# Altium PCB PCB_AT89.PcbDoc
Units mm, origin at the board's own origin, x right, y up, seen from the top; angles counter-clockwise.
Board outline 64 x 64 mm, 2 copper layers (Top Layer, Bottom Layer); 49 components, 58 nets, 189 pads, 5 vias.
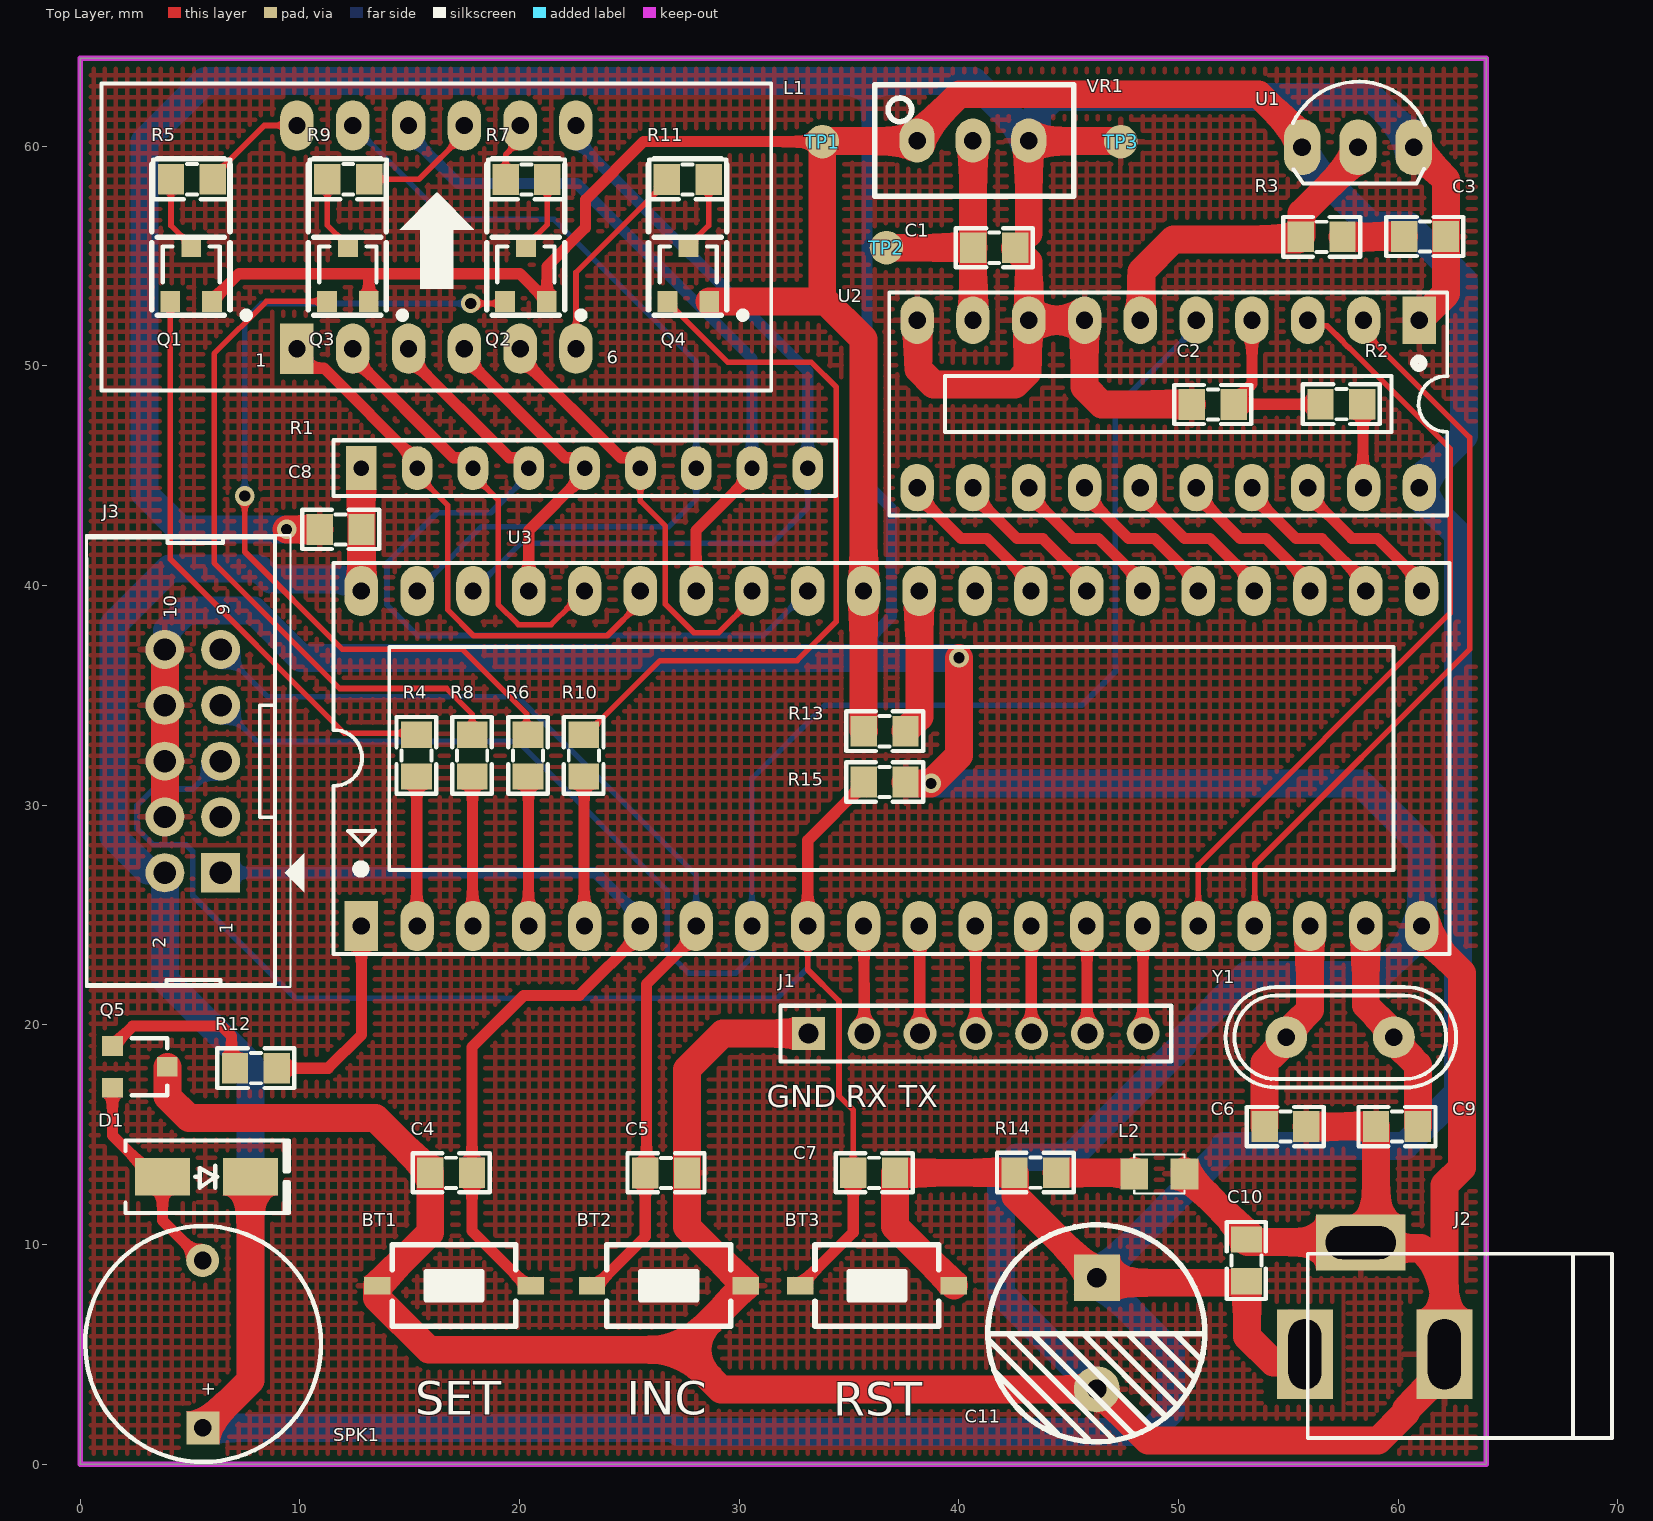
[diagram p0: Top Layer view]
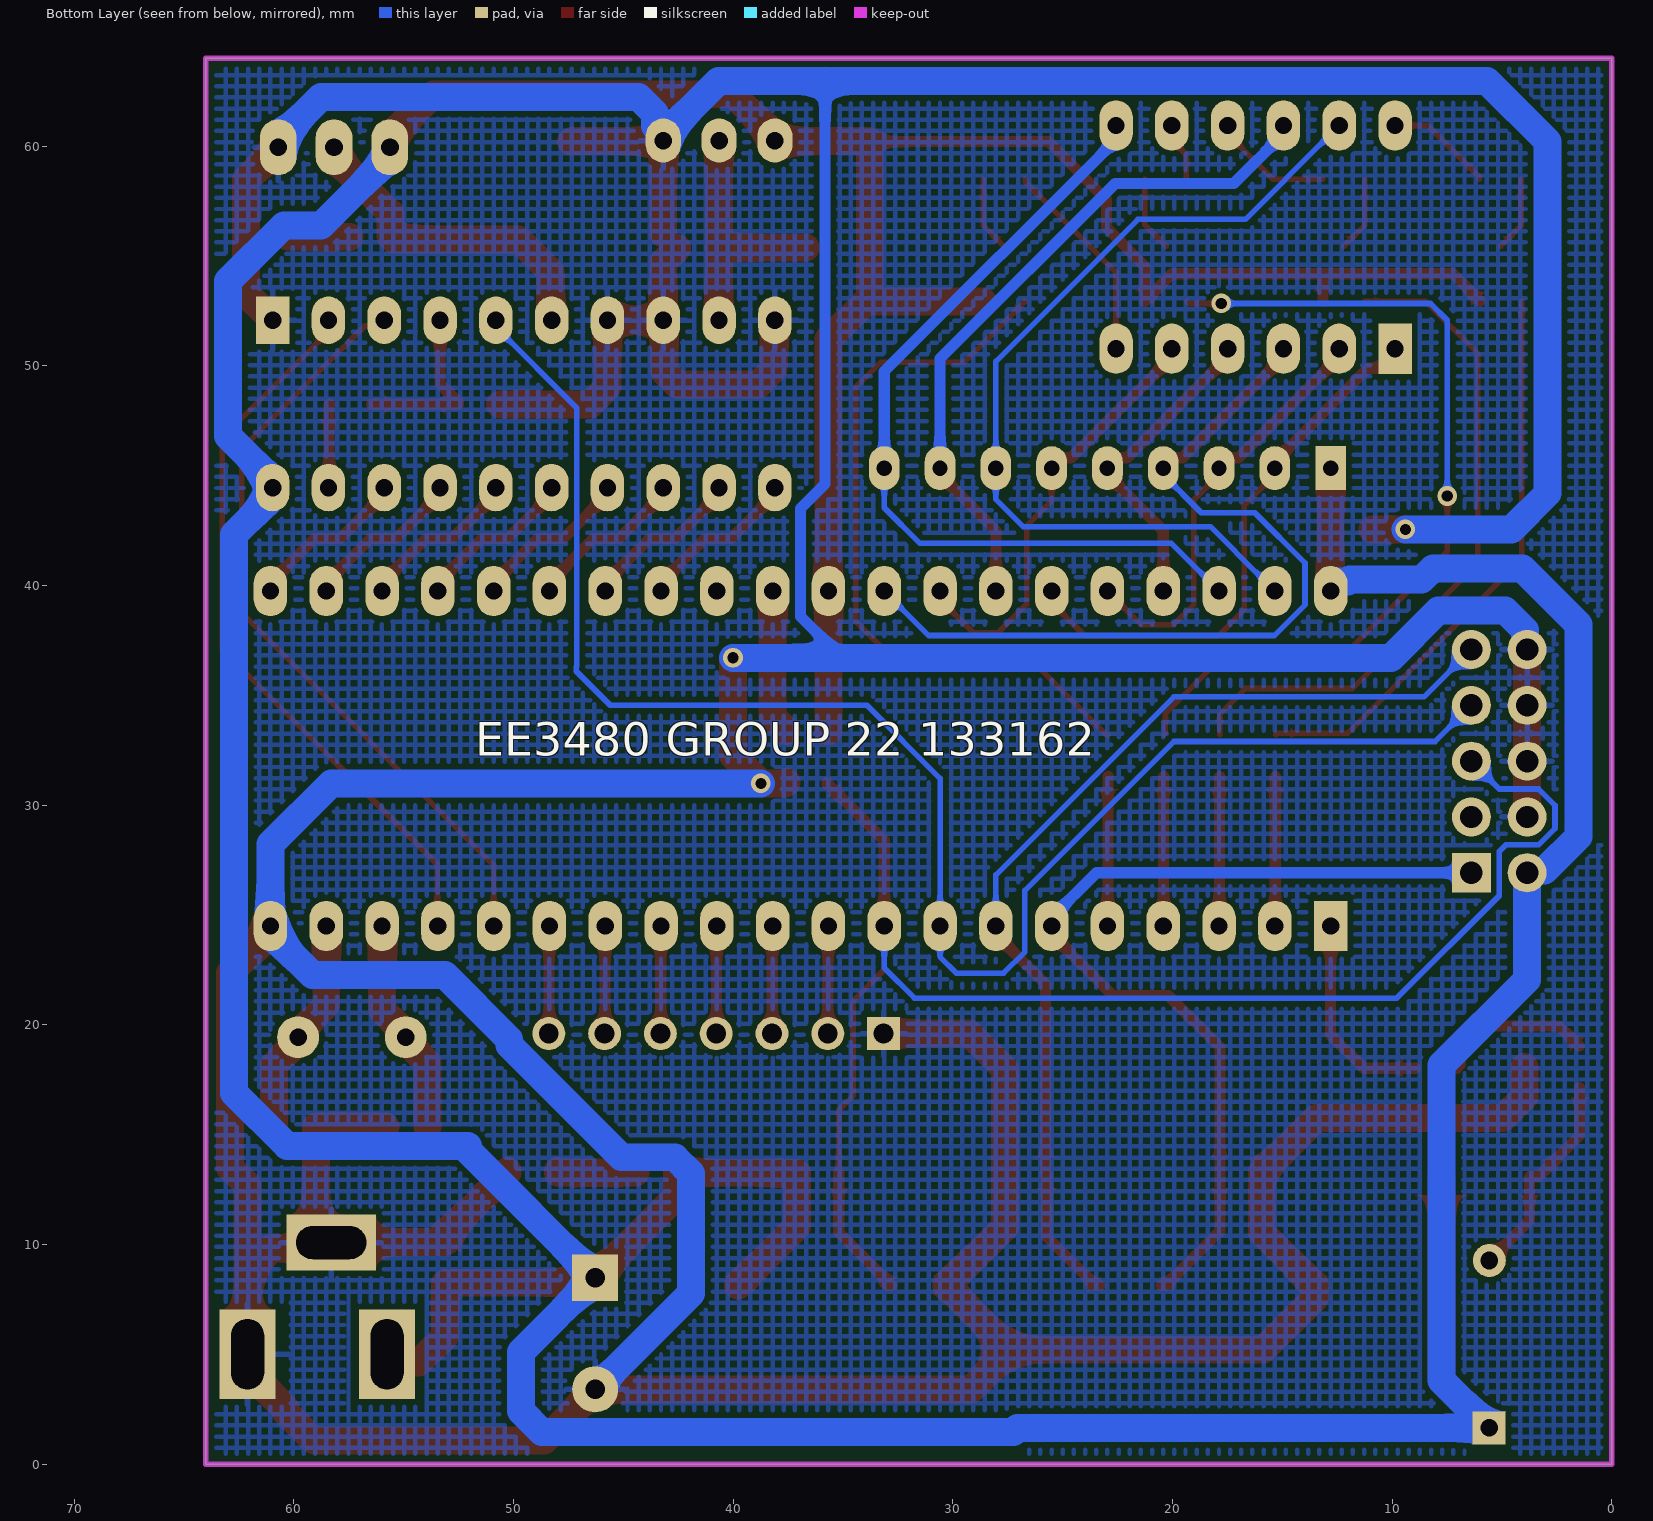
[diagram p1: Bottom Layer view, seen from below]

## Layer stack, top to bottom
Top Solder: solder mask 0.0102, Solder Resist, Dk 3.5
Top Layer: signal copper 0.0356
Dielectric 1: dielectric 0.32, FR-4, Dk 4.8
Bottom Layer: signal copper 0.0356
Bottom Solder: solder mask 0.0102, Solder Resist, Dk 3.5

## Board outline
0,0 0,64 64,64 64,0

## Design rules (kind name [scope] priority, off if disabled: settings)
Clearance [All] p1: gap=0.254 ignorepadtopadclearanceinfootprint=FALSE
ComponentClearance [All] p1: gap=0.254 collisioncheckmode=3 verticalgap=0.008 showdistances=FALSE
HoleSize [All] p1: absolutevalues=TRUE maxlimit=3.302 minlimit=0.025 maxpercent=80.000 minpercent=20.000
PolygonConnect [All] p1: connectstyle=Relief reliefconductorwidth=0.254 reliefentries=4 polygonreliefangle="90 Angle" airgapwidth=0.254
RoutingVias [All] p1: holewidth=0.508 width=0.889 viastyle="Through Hole" minholewidth=0.381 minwidth=0.635 maxholewidth=0.711 maxwidth=1.27
SilkToSolderMaskClearance [IsPad] p1: minsilkscreentomaskgap=0.001 clearancetoexposedcopper=TRUE
SolderMaskExpansion Tenting [IsVia] p1: expansion=0.102 istentingtop=TRUE
SolderMaskExpansion [All] p2: expansion=0.102 istentingtop=FALSE
Width [All] p1: maxlimit=1.27 minlimit=0.254 preferedwidth=0.508
27 further rules are at their usual default settings.

## Components (designator, comment, footprint, x,y, rotation, side; value= is the part's Value field where it differs from the comment)
BT1 "Nut Nhan 2 Chan SMD 3x6x2.5" "Nut Nhan 2 Chan SMD 3x6x2.5" 17.018,8.128 r180 top
BT2 "Nut Nhan 2 Chan SMD 3x6x2.5" "Nut Nhan 2 Chan SMD 3x6x2.5" 26.797,8.128 r0 top
BT3 "Nut Nhan 2 Chan SMD 3x6x2.5" "Nut Nhan 2 Chan SMD 3x6x2.5" 36.271,8.128 r180 top
C1 "104" "tu 0805" 41.605,55.372 r0 top
C2 "104" "tu 0805" 51.562,48.235 r180 top
C3 "104" "tu 0805" 61.214,55.88 r0 top
C4 "104" "tu 0805" 16.891,13.259 r180 top
C5 "104" "tu 0805" 26.67,13.259 r0 top
C6 "22pF" "tu 0805" 54.864,15.367 r0 top
C7 "104" "tu 0805" 36.144,13.259 r180 top
C8 "104" "tu 0805" 11.862,42.545 r180 top
C9 "22pF" "tu 0805" 59.944,15.367 r180 top
C10 "104" "tu 0805" 53.086,9.271 r90 top
C11 "1000uF" "tu hoa 10mm" 46.279,5.944 r270 top
D1 "SS14" "DIODE SMA" 5.747,13.081 r0 top
J1 "Header 7" HDR1X7 33.15,19.6 r0 top
J2 "JACK DC 5.5" "JACK DC 5.5" 58.928,7.544 r180 top value="Jac DC"
J3 "IDC 5X2" IDC10 5,32 r90 top value="Header 5x2"
L1 "Led 7 Segment 4 digitals" LED7SEG-4-0.36 16.347,56.109 r0 top
L2 "LED 0805" LED-0805-Red 50.267,13.21 r180 top
Q1 "HF" SOT23 5.055,54.178 r0 top value=C9014
Q2 "HF" SOT23 20.295,54.178 r0 top value=C9014
Q3 "HF" SOT23 12.192,54.178 r0 top value=C9014
Q4 "HF" SOT23 27.686,54.178 r0 top value=C9014
Q5 "HF" SOT23 2.718,18.085 r270 top value=C9014
R1 "10k" "tro bang a9" 22.962,45.466 r0 top
R2 "10k" "tro smd 0805" 57.404,48.311 r0 top
R3 "220" "tro smd 0805" 56.515,55.804 r180 top
R4 "220" "tro smd 0805" 15.367,32.258 r270 top
R5 "220" "tro smd 0805" 5.08,58.547 r0 top
R6 "220" "tro smd 0805" 20.447,32.258 r270 top
R7 "220" "tro smd 0805" 20.32,58.42 r180 top
R8 "220" "tro smd 0805" 17.907,32.258 r270 top
R9 "220" "tro smd 0805" 12.2,58.547 r0 top
R10 "220" "tro smd 0805" 22.987,32.258 r270 top
R11 "220" "tro smd 0805" 27.661,58.42 r180 top
R12 "220" "tro smd 0805" 7.994,18.085 r0 top
R13 "10k" "tro smd 0805" 36.627,33.299 r180 top
R14 "220" "tro smd 0805" 43.485,13.208 r180 top
R15 "10k" "tro smd 0805" 36.627,30.988 r180 top
SPK1 "Speaker" "Coi Chip Speacker" 5.588,1.651 r90 top
TP1 "TESTPOINT" Testpoint 33.782,60.198 r0 top
TP2 "TESTPOINT" Testpoint 36.703,55.372 r90 top
TP3 "TESTPOINT" Testpoint 47.371,60.198 r90 top
U1 "LM35" QTO-92 58.166,59.944 r0 top
U2 "ADC0804" DIP20 60.96,52.07 r180 top
U3 "AT89C52" DIP40/W0.6 12.8,24.5 r0 top
VR1 "10K" "Bien Tro Vi Chinh Dung" 40.64,60.249 r0 top
Y1 "12Mhz" "Thach Anh 2 chan cam" 57.353,19.431 r180 top value=4Mhz

## Footprints (in the part's own frame and the unit in brackets; to place one, negate y for a bottom-side part, rotate by r counter-clockwise, add the part's x,y. Pads: shape width x height; smd on the part's side, far side on the other; paste and mask are expansions set on the pad)
"Bien Tro Vi Chinh Dung" [mm] "Bien tro vi chinh"
  oval 1.6x2 hole 0.8: 1(-2.54,0) 2(0,0) 3(2.54,0)
  silkscreen extent -4.47,-2.54 4.6,2.54, body extent -4.54,-2.4 4.66,2.4, height 12.02
"Coi Chip Speacker" [mm]
  rect 1.5x1.5 hole 0.8: 1(0,0)
  round 1.5 hole 0.8: 2(7.62,0.013)
  silkscreen extent -1.55,-5.38 9.18,5.36, body extent -2.22,-6 13.24,6, height 4.5
"DIODE SMA" [mm] "SMA"
  rect 2.5x1.7 smd: 1(-2,0) 2(2,0)
  silkscreen extent -3.68,-1.65 3.75,1.65, body extent -2.6,-1.37 2.6,1.37, height 2.4
DIP20 [mil]
  rect 60x85 hole 31: 1(0,0)
  oval 60x85 hole 31: 2(100,0) 3(200,0) 4(300,0) 5(400,0) 6(500,0) 7(600,0) 8(700,0) 9(800,0) 10(900,0) 11(900,300) 12(800,300) 13(700,300) 14(600,300) 15(500,300) 16(400,300) 17(300,300) 18(200,300) 19(100,300) 20(0,300)
  silkscreen extent -50,-50 950,350, body extent -82,0 962,308, height 180
DIP40/W0.6 [mil] "40 PIN, W 600mil, Pin to pin 100mil"
  rect 60x90 hole 31: 1(0,0)
  oval 60x90 hole 31: 2(100,0) 3(200,0) 4(300,0) 5(400,0) 6(500,0) 7(600,0) 8(700,0) 9(800,0) 10(900,0) 11(1000,0) 12(1100,0) 13(1200,0) 14(1300,0) 15(1400,0) 16(1500,0) 17(1600,0) 18(1700,0) 19(1800,0) 20(1900,0) 21(1900,600) 22(1800,600) 23(1700,600) 24(1600,600) 25(1500,600) 26(1400,600) 27(1300,600) 28(1200,600) 29(1100,600) 30(1000,600) 31(900,600) 32(800,600) 33(700,600) 34(600,600) 35(500,600) 36(400,600) 37(300,600) 38(200,600) 39(100,600) 40(0,600)
  silkscreen extent -50,-50 1950,650, body extent -82,-10 1982,600, height 224
HDR1X7 [mm] "Connector; Header; 7 Position"
  rect 1.5x1.5 hole 0.9: 1(0,0)
  round 1.5 hole 0.9: 2(2.54,0) 3(5.08,0) 4(7.62,0) 5(10.16,0) 6(12.7,0) 7(15.24,0)
  silkscreen extent -1.27,-1.27 16.51,1.27
IDC10 [mil]
  rect 70x70 hole 40: 1(-200,-55)
  round 70 hole 40: 2(-200,45) 3(-100,-55) 4(-100,45) 5(0,-55) 6(0,45) 7(100,-55) 8(100,45) 9(200,-55) 10(200,45)
  silkscreen extent -405,-205 405,186, body extent -400,-178 400,180, height 366
"JACK DC 5.5" [mil] "Jac DC input"
  rect 100x160 hole 59.06 slot 125.98 at 90 deg: 1(125,100) 2(-125,100)
  rect 160x100 hole 59.06 slot 125.98 at 0 deg: 3(25,-100)
  silkscreen extent -425,-80 120,250, body extent -410,-105 134,269, height 434
LED7SEG-4-0.36 [mil]
  rect 60x90 hole 31: 1(-255,-210)
  oval 60x90 hole 31: 2(-155,-210) 3(-55,-210) 4(45,-210) 5(145,-210) 6(245,-210) 7(245,190) 8(145,190) 9(45,190) 10(-55,190) 11(-155,190) 12(-255,190)
  silkscreen extent -605,-285 595,265, body extent -596,-291 586,260, height 276
LED-0805-Red [mil]
  rect 50x55 smd: 1(0,0) 2(90,0)
  silkscreen extent 0,-35 90,35, body extent 5,-25 85,25, height 43
"Nut Nhan 2 Chan SMD 3x6x2.5" [mm] "Switch SMD type"
  rect 1.2x0.8 smd: 1(-3.5,0) 2(3.5,0)
  silkscreen extent -2.82,-1.85 2.82,1.85, body extent -3.05,-1.85 3.05,1.85, height 2.5
QTO-92 [mil] "TO-92"
  oval 66x100 hole 32: 1(-100,0) 2(0,0) 3(100,0)
  silkscreen extent -117,-65 120,118, body extent -109,-66 109,95, height 245
SOT23 [mm] "SOT23"
  rect 0.9x0.95 smd: 1(-0.95,-1.25) 2(0,1.25)
  rect 0.9x0.95 smd mask+0: 3(0.95,-1.25)
  silkscreen extent -1.3,-0.37 1.3,1.25, body extent -1.52,-1.23 1.48,1.27, height 1.06
Testpoint [mil]
  round 60 smd: 1(0,0)
"Thach Anh 2 chan cam" [mm]
  round 1.905 hole 0.8: 1(-2.45,0) 2(2.45,0)
  silkscreen extent -5.28,-2.29 5.21,2.29, body extent -5.68,-2.36 5.68,2.29, height 3.5
"tro bang a9" [mm]
  rect 1.4x2 hole 0.7: 1(-10.16,-0.127)
  oval 1.4x2 hole 0.7: 2(-7.62,-0.127) 3(-5.08,-0.127) 4(-2.54,-0.127) 5(0,-0.127) 6(2.54,-0.127) 7(5.08,-0.127) 8(7.62,-0.127) 9(10.16,-0.127)
  silkscreen extent -11.43,-1.4 11.43,1.14, body extent -11.25,-0.76 11.25,0.49, height 5.57
"tro smd 0805" [mm]
  rect 1.2x1.4 smd: 1(-0.946,-0.061) 2(0.954,-0.061)
  silkscreen extent -1.75,-0.97 1.75,0.84, body extent -1.56,-0.76 1.44,0.64, height 0.53
"tu 0805" [mm] "Compoment SMD 80x50mil"
  rect 1.2x1.4 smd: 1(-0.946,-0.003) 2(0.954,-0.003)
  silkscreen extent -1.75,-0.89 1.75,0.89, body extent -1.01,-0.64 1.01,0.63, height 0.61
"tu hoa 10mm" [mm]
  rect 2.1x2.1 hole 0.9: 1(-2.54,0)
  round 2.1 hole 0.9: 2(2.54,0)
  silkscreen extent -4.95,-4.96 4.93,4.92, body extent -5,-5 4.97,5, height 20.01

## Part data
C1 C2 C3 C4 C5 C6 C7 C8 C9 C10: library part CAP0805, "SMD", Chung_Loai=Dán, Don_Vi=Con, Ma_Hang=MH004551, So_Chan=2, Ten_Linh_Kien="Tụ 0805 104-100nF 10% 50V"
C11: library part CAPElectrolytic, "THT", Chung_Loai=Cắm, Don_Vi=Con, Ma_Hang=MH006614, So_Chan=2, Ten_Linh_Kien="Tụ Hóa 1000uF 10V 10x12MM"
D1: library part "Diode SS14 ( 1N5819)", "Dán", Chung_Loai=Dán, Don_Vi=Con, Ma_Hang=MH002211, Ten_Linh_Kien="Diode SS14 DO214 Schottky 1A 40V ( 1N5819 DO214)"
J1: "Header, 7-Pin", LatestRevisionDate=17-Jul-2002, LatestRevisionNote="Re-released for DXP Platform.", Publisher="Altium Limited"
J2 U1 U2 U3: "THT"
  U2: Chung_Loai=Cắm, Don_Vi=Con, Ma_Hang=MH002626, Ten_Linh_Kien="ADC0804LCN DIP20"
  U3: Chung_Loai=Cắm, Don_Vi=Con, Ma_Hang=MH002200, Ten_Linh_Kien="AT89C52-24PC DIP40"
J3: library part "ICSP 5x2", "THT"
L1: library part LED7SEG-A-0.36-4DIGIT, "4 digit 7 segment anot", Category=LED, Solder=WAVE
L2: library part LED0805, "SMD", Chung_Loai=Dán, Don_Vi=Con, Ma_Hang=MH000897, Ten_Linh_Kien="LED 0805 Màu Đỏ (Red)"
Q1 Q2 Q3 Q4 Q5: library part "C1815 HF SMD", "NPN transistor"
R1: library part "Tro Bang A9 10k", "Cắm", Chung_Loai=Cắm, Don_Vi=Con, Ma_Hang=MH001442, So_Chan=9, Ten_Linh_Kien="Trở Băng A09-103 10k 1/8w 5%"
R2 R3 R4 R5 R6 R7 R8 R9 R10 R11 R12 R13 R14 R15: library part RES0805, "SMD", Chung_Loai=Dán, Don_Vi=Con, Ma_Hang=MH005473, So_Chan=2, Ten_Linh_Kien="Trở 0805 1% 10k"
SPK1: library part "Coi Chip Speaker", "Còi chip"
TP1 TP2 TP3: "SMD"
VR1: library part RESVariable, "THT", Chung_Loai=Cắm, Don_Vi=Con, Ma_Hang=MH003232, Ten_Linh_Kien="Biến Trở VR 103-10K 3296W"
Y1: library part "Thach Anh 2 chan Cam", "Crystal For all Crystal 2pin."
BT1 BT2 BT3: Ma_Hang=MH001036, Ten="Nút Nhấn 2 Chân 3x6x2.5MM SMD"

## Via types
v1: diameter 0.889, hole 0.508, Top Layer to Bottom Layer, tented both sides, 5 vias

## Nets (pads, with @x,y where several pads share a name; then routed paths per layer and width w, separated by ;. In a path a pad name is that pad's centre, name@x,y a point inside that pad or via, vN(x,y) a via of type N, cw(c..) or ccw(c..) an arc to the next point about the centre after c; other vN are vias at no path point)
+5V: BT3.1 C7.1 C8.1 C10.1 C11.1 D1.2 J2.1 J3.2 Q1.3 Q2.3 Q3.3 Q4.3 R1.1 R13.2 R14.2 SPK1.1 TP1.1 U1.1 U2.20 U3.31 U3.40 VR1.1 | length 315.3
  Top Layer w0.508: Q1.3 6.005,52.953 7.239,54.188 13.081,54.188 ; Q3.3 13.142,54.127 13.081,54.188 ; Q2.3 Q2.3@21.245,52.953 ; TP1.1 25.654,60.198 23.007,57.551 23.007,56.281 21.245,54.519 Q2.3@21.245,52.953 ; 13.081,54.188 20.01,54.188 Q2.3@21.245,52.953
  Top Layer w1.27: SPK1.1 7.747,3.81 D1.2 ; U3.40 12.804,39.744 12.804,42.545 C8.1 12.805,42.551 12.805,45.336 R1.1 ; Q4.3 33.624,52.928 33.782,53.086 ; R13.2 35.666,33.366 35.666,39.734 U3.31 35.66,51.208 33.782,53.086 ; BT3.1 37.09,10.809 C7.1 37.093,13.266 42.526,13.266 R14.2 42.565,13.235 42.565,12.197 C11.1 46.504,8.259 53.08,8.259 53.115,8.224 53.115,5.813 54.313,4.615 55.365,4.615 J2.1 55.753,5.766 J2.1@55.118,6.401 ; U1.1 55.626,60.376 53.645,62.357 40.017,62.357 38.1,60.44 VR1.1 38.075,60.223 33.807,60.223 TP1.1 33.782,53.086
  Bottom Layer w1.27: J3.2@3.067,27.017 1.524,28.56 1.524,38.227 4.064,40.767 8.15,40.767 8.658,40.259 11.929,40.259 12.018,40.17 12.683,40.17 12.8,40.052 U3.40 ; J3.2 3.857,22.051 7.747,18.161 7.747,3.81 SPK1.1 27.055,1.651 27.242,1.465 48.709,1.465 49.657,2.413 49.657,5.105 C11.1 52.07,14.275 52.07,14.478 60.298,14.478 62.711,16.891 62.711,42.313 60.96,44.064 U2.20 60.96,44.768 62.984,46.792 62.984,53.856 60.452,56.388 58.75,56.388 55.626,59.512 U1.1
A: L1.11 R1.7 U3.39 | length 40.8
  Bottom Layer w0.254: L1.11 12.41,60.897 12.997,60.311 13.034,60.311 16.686,56.659 21.573,56.659 28.042,50.19 R1.7 28.042,43.917 26.797,42.672 18.272,42.672 15.964,40.364 15.927,40.364 15.34,39.777 U3.39
ALE: R13.1 U3.30 | length 6.6
  Top Layer w1.27: R13.1 37.572,33.39 38.2,34.018 U3.30
B: L1.7 R1.9 U3.38 | length 38.6
  Bottom Layer w0.254: U3.38 17.88,39.777 18.467,40.364 18.504,40.364 20.05,41.91 31.496,41.91 33.122,43.536 R1.9
  Bottom Layer w0.508: L1.7 22.57,60.283 33.122,49.732 R1.9
C: L1.4 R1.5 U3.37 | length 14.6
  Top Layer w0.508: L1.4 17.49,50.394 22.074,45.81 22.55,45.81 22.962,45.398 R1.5 22.962,45.039 20.42,42.497 U3.37
CLKI: C2.1 R2.1 U2.4 | length 8.1
  Top Layer w0.508: U2.4 53.34,49.17 52.508,48.338 C2.1 52.514,48.244 56.452,48.244 R2.1
CLKR: R2.2 U2.19 | length 3.8
  Top Layer w0.508: R2.2 58.389,48.219 58.389,44.481 U2.19
D: L1.2 R1.3 U3.36 | length 19.6
  Top Layer w0.254: R1.3 17.882,45.039 19.024,43.897 19.024,39.139 19.947,38.216 21.436,38.216 22.336,39.116 22.373,39.116 22.96,39.703 U3.36
  Top Layer w0.508: L1.2 12.41,50.394 16.994,45.81 17.47,45.81 17.882,45.398 R1.3
DB0: U2.18 U3.21 | length 7.5
  Top Layer w0.508: U2.18 55.88,44.133 57.886,42.127 59.054,42.127 61.06,40.121 U3.21
DB1: U2.17 U3.22 | length 7.5
  Top Layer w0.508: U2.17 53.34,44.133 55.346,42.127 56.514,42.127 58.52,40.121 U3.22
DB2: U2.16 U3.23 | length 7.5
  Top Layer w0.508: U2.16 50.8,44.133 52.806,42.127 53.974,42.127 55.98,40.121 U3.23
DB3: U2.15 U3.24 | length 7.5
  Top Layer w0.508: U2.15 48.26,44.133 50.266,42.127 51.434,42.127 53.44,40.121 U3.24
DB4: U2.14 U3.25 | length 7.5
  Top Layer w0.508: U2.14 45.72,44.133 47.726,42.127 48.894,42.127 50.9,40.121 U3.25
DB5: U2.13 U3.26 | length 7.5
  Top Layer w0.508: U2.13 43.18,44.133 45.186,42.127 46.354,42.127 48.36,40.121 U3.26
DB6: U2.12 U3.27 | length 7.5
  Top Layer w0.508: U2.12 40.64,44.133 42.646,42.127 43.814,42.127 45.82,40.121 U3.27
DB7: U2.11 U3.28 | length 7.5
  Top Layer w0.508: U2.11 38.1,44.133 40.106,42.127 41.274,42.127 43.28,40.121 U3.28
E: L1.1 R1.2 U3.35 | length 25.6
  Top Layer w0.254: R1.2 15.342,45.039 16.737,43.644 16.737,38.886 17.915,37.708 23.992,37.708 25.5,39.216 U3.35
  Top Layer w0.508: L1.1 9.87,50.394 10.378,49.886 11.095,49.886 15.342,45.639 R1.2
F: L1.10 R1.8 U3.34 | length 31.9
  Top Layer w0.508: U3.34 28.04,42.497 30.582,45.039 R1.8
  Bottom Layer w0.508: L1.10 14.95,60.554 17.211,58.293 22.606,58.293 30.582,50.317 R1.8
G: L1.5 R1.6 U3.33 | length 20.1
  Top Layer w0.254: R1.6 25.502,43.84 26.643,42.699 26.643,39.14 27.937,37.846 29.067,37.846 30.58,39.359 U3.33
  Top Layer w0.508: L1.5 20.03,50.394 24.614,45.81 25.09,45.81 25.502,45.398 R1.6
GND: BT1.2 BT2.2 C1.2 C2.2 C3.2 C4.2 C5.2 C6.2 C8.2 C9.2 C10.2 C11.2 J1.1 J2.2 J2.3 J3.4 J3.6 J3.8 J3.10 L2.1 Q5.2 R15.1 TP3.1 U1.3 U2.1 U2.7 U2.8 U2.10 U3.20 VR1.3 | length 412.7
  Top Layer w1.27: J3.4 J3.8 J3.10 ; Q5.2 3.968,16.733 4.953,15.748 13.451,15.748 15.872,13.327 15.902,13.327 15.937,13.292 C4.2 15.937,10.547 BT1.2 13.518,7.564 15.875,5.207 27.376,5.207 ; v1(9.398,42.545) 10.904,42.545 C8.2 ; J1.1 29.252,19.6 27.624,17.972 C5.2 27.624,10.801 BT2.2 27.376,5.207 ; R15.1 37.572,31.023 37.607,30.988 v1(38.735,30.988) 40.005,32.258 v1(40.005,36.703) ; U2.10 38.149,52.021 38.149,49.844 38.844,49.149 42.563,49.149 43.131,49.717 43.131,52.021 U2.8 ; C1.2 42.56,55.339 43.18,54.718 U2.8 ; 43.18,56.019 VR1.3 43.205,60.223 47.346,60.223 TP3.1 ; L2.1@50.267,13.335 50.267,13.272 53.05,10.488 53.05,10.159 53.085,10.124 53.115,10.124 53.135,10.104 58.273,10.104 J2.3 ; C2.2 46.504,48.238 45.72,49.022 U2.7 U2.8 ; C6.2 55.822,15.367 58.986,15.367 C9.2 58.99,10.719 58.355,10.084 J2.3 ; U1.3 60.706,59.622 60.894,59.434 61.216,59.434 62.168,58.482 C3.2 62.168,53.278 61.404,52.515 61.087,52.515 60.96,52.388 U2.1 ; U3.20 61.06,24.188 62.896,22.352 62.896,13.493 62.103,12.7 62.103,8.763 ; 27.376,5.207 29.179,3.404 C11.2 48.616,1.067 59.08,1.067 60.359,2.346 60.359,2.498 62.103,4.242 J2.2 62.103,8.763 ; J2.3 58.547,9.83 61.036,9.83 62.103,8.763
  Bottom Layer w0.508: 35.052,36.703 36.93,38.581 36.93,43.506 35.814,44.622 35.814,62.967
  Bottom Layer w1.27: J3.10 3.954,37.177 3.954,37.957 4.855,38.858 7.904,38.858 10.059,36.703 35.052,36.703 v1(40.005,36.703) ; v1(9.398,42.545) 4.572,42.545 2.921,44.196 2.921,60.198 5.69,62.967 35.814,62.967 40.662,62.967 VR1.3@43.18,60.449 ; v1(38.735,30.988) 58.293,30.988 61.06,28.221 U3.20 61.06,24.17 59.149,22.259 53.12,22.259 50.188,19.327 50.188,19.081 45.078,13.97 42.654,13.97 41.91,13.226 41.91,7.772 C11.2 ; VR1.3 VR1.3@43.18,60.449 ; U1.3 60.706,60.278 58.754,62.23 44.305,62.23 43.561,61.486 43.561,60.919 43.18,60.538 VR1.3@43.18,60.449
H: L1.3 R1.4 U3.32 | length 38.9
  Top Layer w0.508: L1.3 14.95,50.394 19.534,45.81 20.01,45.81 20.422,45.398 R1.4
  Bottom Layer w0.254: R1.4 20.422,45.039 18.69,43.307 16.256,43.307 13.97,41.021 13.97,39.113 15.364,37.719 31.099,37.719 32.496,39.116 32.533,39.116 33.12,39.703 U3.32
INC: BT2.1 C5.1 J3.9 U3.7 | length 46.7
  Top Layer w0.508: BT2.1 23.497,8.128 25.724,10.355 C5.1 25.781,13.312 25.781,21.86 28.04,24.119 U3.7
  Bottom Layer w0.254: J3.9 8.552,34.925 19.939,34.925 28.04,26.824 U3.7
INT0: J1.4 U3.12 | length 4.9
  Top Layer w0.508: U3.12 40.755,24.485 40.755,19.615 J1.4
INT1: J1.5 U3.13 | length 4.9
  Top Layer w0.508: U3.13 43.295,24.485 43.295,19.615 J1.5
INTR: J3.7 U2.5 U3.8 | length 75.4
  Bottom Layer w0.254: J3.7 8.044,32.893 19.939,32.893 26.717,26.115 26.717,23.321 27.686,22.352 29.845,22.352 30.58,23.087 U3.8 30.58,31.215 33.909,34.544 45.593,34.544 47.139,36.09 47.139,36.3 47.117,36.322 47.117,48.07 50.8,51.753 U2.5
L1: L1.12 R5.2 | length 4.9
  Top Layer w0.254: R5.2 6.034,58.586 8.383,60.935 L1.12
L2: L1.9 R9.2 | length 5.6
  Top Layer w0.254: R9.2 15.423,58.486 17.49,60.554 L1.9
L3: L1.8 R7.2 | length 2.7
  Top Layer w0.254: R7.2 19.366,59.602 20.03,60.266 L1.8
L4: L1.6 R11.2 | length 9.4
  Top Layer w0.254: L1.6 22.57,54.245 26.706,58.381 R11.2
LED: L2.2 R14.1 | length 3.6
  Top Layer w1.27: R14.1 47.979,13.27 47.981,13.272 L2.2@47.981,13.335
NetC3_1: C3.1 R3.1 | length 2.8
  Top Layer w1.27: R3.1 57.467,55.871 60.262,55.871 C3.1
NetD1_1: D1.1 Q5.3 SPK1.2 | length 9.8
  Top Layer w0.508: Q5.3 1.468,14.96 3.347,13.081 D1.1 3.747,11.099 SPK1.2
NetQ1_1: Q1.1 R4.1 | length 26.2
  Top Layer w0.254: Q1.1 4.105,41.189 12.019,33.274 15.236,33.274 R4.1
NetQ1_2: Q1.2 R5.1 | length 3.4
  Top Layer w0.254: R5.1 4.134,56.373 5.055,55.453 Q1.2
NetQ2_1: Q2.1 R6.1 | length 39.6
  Top Layer w0.254: v1(7.493,44.069) 7.493,41.529 11.938,37.084 17.399,37.084 20.32,34.163 20.32,33.27 R6.1 ; v1(17.78,52.832) 19.248,52.832 Q2.1
  Bottom Layer w0.254: v1(7.493,44.069) 7.493,52.07 8.255,52.832 v1(17.78,52.832)
NetQ2_2: Q2.2 R7.1 | length 3.5
  Top Layer w0.254: Q2.2 20.295,55.453 21.266,56.424 R7.1
NetQ3_1: Q3.1 R8.1 | length 31.2
  Top Layer w0.254: Q3.1 8.478,52.928 6.096,50.546 6.096,41.021 11.811,35.306 16.681,35.306 17.846,34.141 R8.1
NetQ3_2: Q3.2 R9.1 | length 3.4
  Top Layer w0.254: R9.1 11.254,56.391 12.192,55.453 Q3.2
NetQ4_1: Q4.1 R10.1 | length 33.6
  Top Layer w0.254: R10.1 23.026,33.204 26.399,36.576 32.639,36.576 34.417,38.354 34.417,49.022 33.274,50.165 29.474,50.165 26.736,52.903 Q4.1
NetQ4_2: Q4.2 R11.1 | length 3.4
  Top Layer w0.254: Q4.2 27.686,55.453 28.606,56.373 R11.1
NetQ5_1: Q5.1 R12.1 | length 7.5
  Top Layer w0.508: Q5.1 1.493,19.035 2.397,19.939 6.433,19.939 6.886,19.486 6.886,18.186 R12.1
Q1: R4.2 U3.2 | length 6.8
  Top Layer w0.508: R4.2 15.323,31.287 15.323,24.517 U3.2
Q2: R8.2 U3.3 | length 6.8
  Top Layer w0.508: R8.2 17.863,31.287 17.863,24.517 U3.3
Q3: R6.2 U3.4 | length 6.8
  Top Layer w0.508: R6.2 20.403,31.287 20.403,24.517 U3.4
Q4: R10.2 U3.5 | length 6.8
  Top Layer w0.508: R10.2 22.943,31.287 22.943,24.517 U3.5
RD: U2.2 U3.17 | length 33.6
  Top Layer w0.254: U3.17 53.467,24.527 53.467,27.305 63.246,37.084 63.246,46.736 58.42,51.562 U2.2
RST: BT3.2 C7.2 J3.5 R15.2 U3.9 | length 69.1
  Top Layer w0.254: U3.9 33.12,22.506 34.544,21.082 34.544,16.764 35.19,16.118 C7.2
  Top Layer w0.508: BT3.2 32.971,8.128 33.117,8.274 33.117,8.474 35.19,10.547 C7.2 ; U3.9 33.12,28.396 35.672,30.949 35.723,30.949 R15.2@35.723,31.049
  Bottom Layer w0.254: J3.5 5.127,30.73 3.331,30.73 2.587,29.986 2.587,28.934 3.331,28.19 4.83,28.19 5.127,27.893 5.127,25.873 9.791,21.209 31.75,21.209 33.12,22.579 U3.9
RX: J1.2 U3.10 | length 4.9
  Top Layer w0.508: U3.10 35.675,24.485 35.675,21.863 35.693,21.845 35.693,19.603 J1.2
SET: BT1.1 C4.1 J3.1 U3.6 | length 42.6
  Top Layer w0.508: BT1.1 20.318,8.128 17.837,10.609 C4.1 17.837,18.98 20.193,21.336 22.717,21.336 25.5,24.119 U3.6
  Bottom Layer w0.508: J3.1 23.461,26.92 25.5,24.881 U3.6
SPK: R12.2 U3.1 | length 9.4
  Top Layer w0.508: R12.2 11.293,18.024 12.8,19.531 U3.1
T0: J1.6 U3.14 | length 4.9
  Top Layer w0.508: U3.14 45.835,24.485 45.835,19.615 J1.6
T1: J1.7 U3.15 | length 4.9
  Top Layer w0.508: U3.15 48.375,24.485 48.375,19.615 J1.7
TX: J1.3 U3.11 | length 4.9
  Top Layer w0.508: U3.11 38.215,24.485 38.215,19.615 J1.3
VIN: R3.2 U1.2 U2.6 | length 15.3
  Top Layer w1.27: U2.6 48.309,52.119 48.309,54.296 49.766,55.753 55.449,55.753 55.496,55.8 55.526,55.8 55.561,55.835 R3.2 55.596,55.9 55.596,56.942 58.166,59.512 U1.2
VREF: C1.1 TP2.1 U2.9 VR1.2 | length 12.2
  Top Layer w1.27: TP2.1 36.705,55.37 C1.1@40.658,55.37 ; U2.9 40.65,52.08 40.65,55.359 C1.1 C1.1@40.658,55.37 ; VR1.2 40.65,60.239 40.65,55.378 C1.1@40.658,55.37
WR: U2.3 U3.16 | length 35.8
  Top Layer w0.254: U3.16 50.9,27.278 62.357,38.735 62.357,46.228 57.779,50.806 ; U2.3 56.134,51.816 56.769,51.816 57.474,51.111 ; 57.474,51.111 ccw(c58.42,51.752) 57.779,50.806 ; 57.474,51.111 ccw(c58.42,51.752) 57.779,50.806
XTAL1: C6.1 U3.18 Y1.2 | length 10
  Top Layer w1.27: C6.1 53.918,18.274 54.903,19.259 Y1.2 54.903,19.603 55.98,20.68 U3.18
XTAL2: C9.1 U3.19 Y1.1 | length 10.1
  Top Layer w1.27: U3.19 58.52,20.886 59.803,19.603 Y1.1 59.803,19.259 60.89,18.173 C9.1
pads on no net: J3.3 U3.29

## Polygon pours and split planes (outlines as drawn)
GND on Top Layer "GND_Top" (hatched 90Degree grid 0.508 track 0.203, pour order 0): 0,64 64,64 64,0 0,0
GND on Bottom Layer "GND_Bot" (hatched 90Degree grid 0.508 track 0.203, pour order 1): 0,64 64,64 64,0 0,0

## Keep-outs
Keep-Out Layer:
  the board outline again, w0.254

## Silkscreen, mask and mechanical layers (free items; w line width, h text height)
Top Overlay:
  text "GND" at 31.254,16.254 h1.02
  text "RX" at 34.854,16.254 h1.02
  text "TX" at 37.254,16.254 h1.02
  text "SET" at 15.254,2.254 h1.52
  text "INC" at 24.892,2.254 h1.52
  text "RST" at 34.29,2.21 h1.52
Bottom Overlay:
  text "EE3480 GROUP 22 133162" at 51.746,32.254 h1.52

## Text inside footprints (layer, text, board x,y; h text height)
J3: Top Overlay "1" at 7.147,24.145 h1.02 r90; Top Overlay "2" at 4.111,23.491 h1.02 r90; Top Overlay "9" at 7.007,38.629 h1.02 r90; Top Overlay "10" at 4.594,38.502 h1.02 r90
L1: Top Overlay "6" at 23.967,49.886 h1.02; Top Overlay "1" at 7.965,49.759 h1.02
SPK1: Top Overlay "+" at 6.299,3.061 h1.02 r90